# Altium PCB 2.0.PcbDoc
Units mil, origin at the board's own origin, x right, y up, seen from the top; angles counter-clockwise.
Board outline 3815 x 3365 mil, 2 copper layers (Top Layer, Bottom Layer); 23 components, 34 nets, 115 pads, 5 vias.
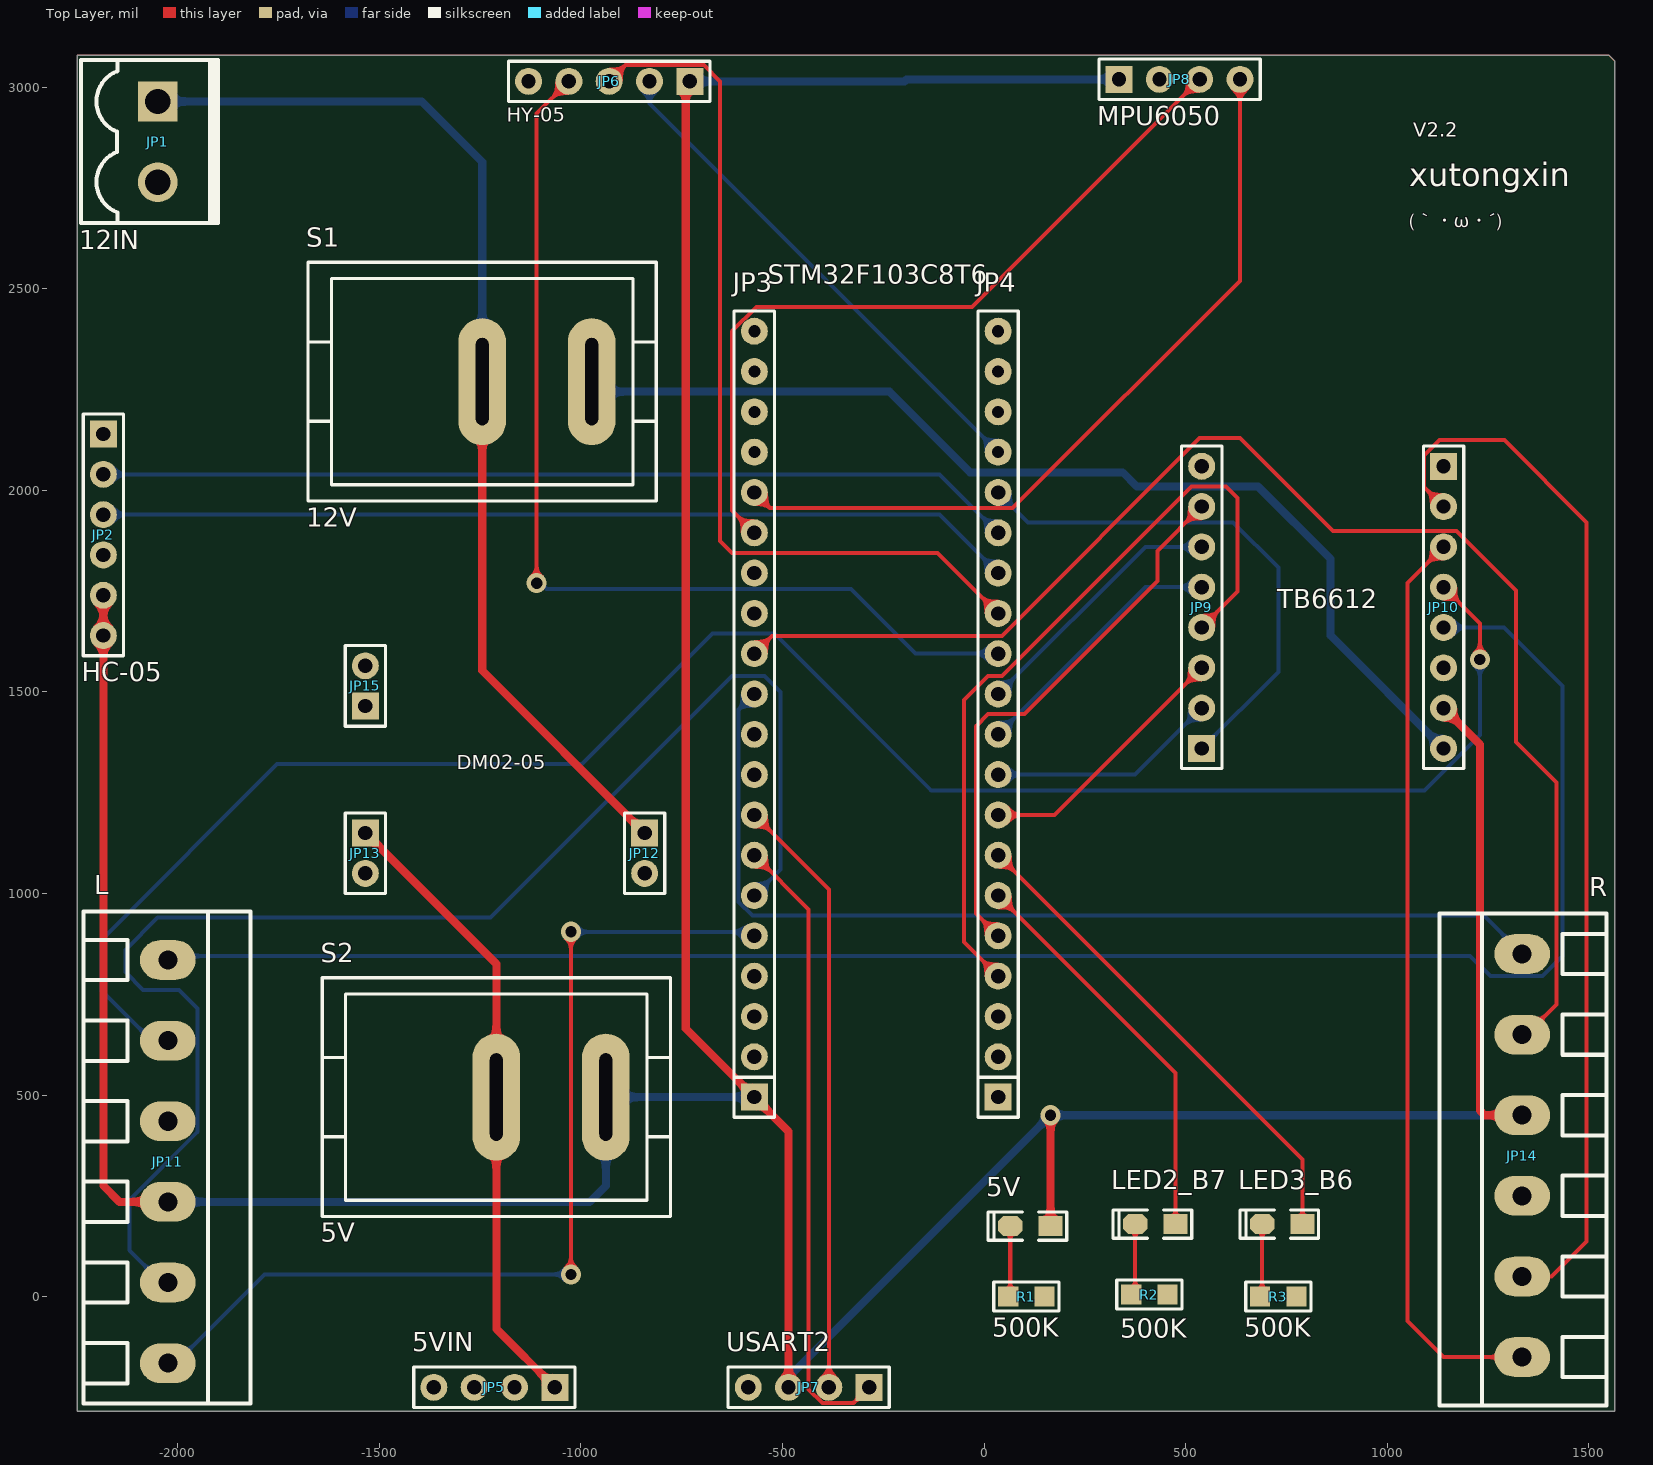
[diagram p0: Top Layer view]
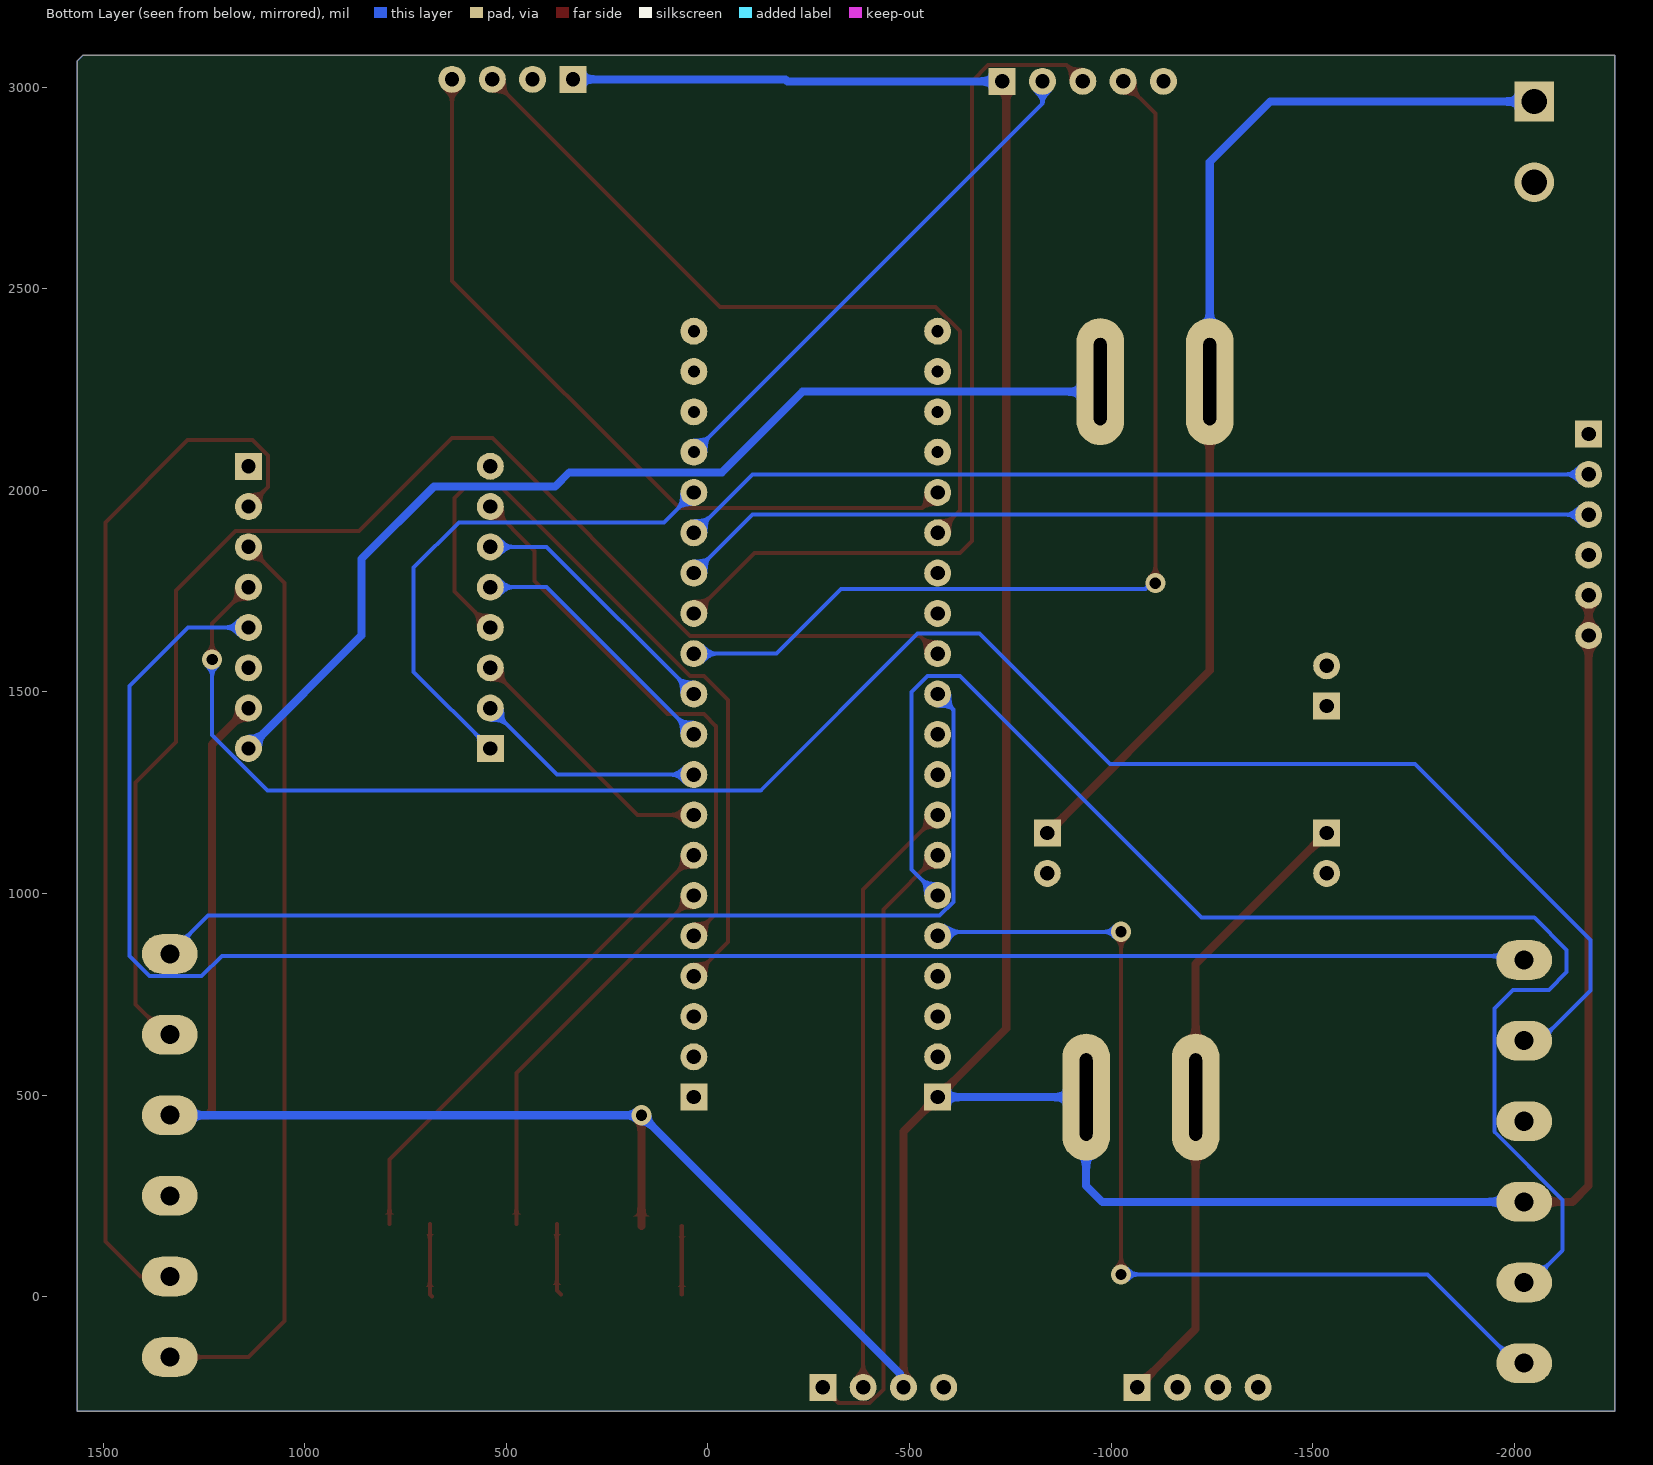
[diagram p1: Bottom Layer view, seen from below]

## Layer stack, top to bottom
Top Solder: solder mask 0.4, Solder Resist, Dk 3.5
Top Layer: signal copper 1.4
Dielectric 1: dielectric 12.6, FR-4, Dk 4.8
Bottom Layer: signal copper 1.4
Bottom Solder: solder mask 0.4, Solder Resist, Dk 3.5

## Board outline
-2250,-285 1565,-285 1565,3065.52 1550.52,3080 -2250,3080

## Design rules (kind name [scope] priority, off if disabled: settings)
Clearance [All] p1: gap=10 ignorepadtopadclearanceinfootprint=FALSE except(0: Arc-Hole Track-Hole SMDPad-Hole THPad-Hole Via-Hole Fill-Hole Poly-Hole Region-Hole Text-Hole)
PolygonConnect [All] p1: connectstyle=Relief reliefconductorwidth=10 reliefentries=4 polygonreliefangle="90 Angle" airgapwidth=10
RoutingVias [All] p1: holewidth=28 width=50 viastyle="Through Hole" minholewidth=28 minwidth=50 maxholewidth=28 maxwidth=50
SilkToSilkClearance [All] p1: silktosilkclearance=0
SilkToSolderMaskClearance [IsPad] p1: minsilkscreentomaskgap=0 clearancetoexposedcopper=TRUE
SolderMaskExpansion [All] p1: expansion=4 istentingtop=FALSE
Width [All] p1: maxlimit=20 minlimit=10 preferedwidth=10
28 further rules are at their usual default settings.

## Classes and differential pairs
component class 0.3: 5V JP1 JP2 JP3 JP4 JP5 JP8 JP10 JP12 JP15 LED2_B7 LED3_B6 R1 R2 R3 S1 S2

## Components (designator, comment, footprint, x,y, rotation, side; value= is the part's Value field where it differs from the comment)
5V "绿色" "LED 0805G" 115,175 r180 top (schematic designator LED1)
JP1 "12IN" KF2EDGK5.08-LI-2P -2050,2865 r270 top
JP2 "HC-05" HDR2.54-M-LI-6P -2185,1890 r270 top
JP3 "STM32F103C8T6" HDR2.54-M-LI-20P -570,1445 r90 top
JP4 "HDR-1X20" HDR2.54-M-LI-20P 35,1445 r90 top
JP5 "5VIN" HDR2.54-M-LI-4P -1215,-225 r180 top
JP6 "HY-05" HDR2.54-M-LI-5P -930,3015 r180 top
JP7 "USART2" HDR2.54-M-LI-4P -435,-225 r180 top
JP8 "MPU6050" HDR2.54-M-LI-4P 485,3020 r0 top
JP9 "HDR-1X8" HDR2.54-M-LI-8P 540,1710 r90 top
JP10 "TB6612" HDR2.54-M-LI-8P 1140,1710 r270 top
JP11 "L" KF128-5.08-6P -2025,335 r270 top
JP12 "HDR-1X2" HDR2.54-M-LI-2P -842.09,1100 r270 top
JP13 "HDR-1X2" HDR2.54-M-LI-2P -1535,1100 r270 top
JP14 "R" KF128-5.08-6P 1335,350 r90 top
JP15 "DM02-05" HDR2.54-M-LI-2P -1535,1515 r90 top
LED2_B7 "红色" "LED 0805G" 425,180 r180 top (schematic designator LED2)
LED3_B6 "红色" "LED 0805G" 740,180 r180 top (schematic designator LED3)
R1 "500K" "R 0805_M" 105,0 r0 top
R2 "500K" "R 0805_M" 410,5 r0 top
R3 "500K" "R 0805_M" 730,0 r0 top
S1 "12V" KCD1-101 -1245,2270 r0 top
S2 "5V" KCD1-101 -1210,495 r0 top

## Footprints (in the part's own frame and the unit in brackets; to place one, negate y for a bottom-side part, rotate by r counter-clockwise, add the part's x,y. Pads: shape width x height; smd on the part's side, far side on the other; paste and mask are expansions set on the pad)
HDR2.54-M-LI-2P [mm] "排母，2脚    淘宝ID:黄晶宝石   店铺网址:https://shop463601444.taobao.com"
  rect 1.7x1.7 hole 0.9: 1(-1.27,0)
  round 1.7 hole 0.9: 2(1.27,0)
  silkscreen extent -2.54,-1.27 2.54,1.27, body extent -2.54,-1.27 2.54,1.27, height 8.5
HDR2.54-M-LI-4P [mm] "排母，4脚  淘宝ID:黄晶宝石   店铺网址:https://shop463601444.taobao.com"
  rect 1.7x1.7 hole 0.9: 1(-3.81,0)
  round 1.7 hole 0.9: 2(-1.27,0) 3(1.27,0) 4(3.81,0)
  silkscreen extent -5.08,-1.27 5.08,1.27, body extent -5.08,-1.27 5.08,1.27, height 8.5
HDR2.54-M-LI-5P [mm] "排母，5脚   淘宝ID:黄晶宝石   店铺网址:https://shop463601444.taobao.com"
  rect 1.7x1.7 hole 0.9: 1(-5.08,0)
  round 1.7 hole 0.9: 2(-2.54,0) 3(0,0) 4(2.54,0) 5(5.08,0)
  silkscreen extent -6.35,-1.27 6.35,1.27, body extent -6.35,-1.27 6.35,1.27, height 8.5
HDR2.54-M-LI-6P [mm] "排母，6脚  淘宝ID:黄晶宝石   店铺网址:https://shop463601444.taobao.com"
  rect 1.7x1.7 hole 0.9: 1(-6.35,0)
  round 1.7 hole 0.9: 2(-3.81,0) 3(-1.27,0) 4(1.27,0) 5(3.81,0) 6(6.35,0)
  silkscreen extent -7.62,-1.27 7.62,1.27, body extent -7.62,-1.27 7.62,1.27, height 8.5
HDR2.54-M-LI-8P [mm] "排母，8脚"
  rect 1.7x1.7 hole 0.9: 1(-8.89,0)
  round 1.7 hole 0.9: 2(-6.35,0) 3(-3.81,0) 4(-1.27,0) 5(1.27,0) 6(3.81,0) 7(6.35,0) 8(8.89,0)
  silkscreen extent -10.16,-1.27 10.16,1.27, body extent -10.16,-1.27 10.16,1.27, height 8.5
HDR2.54-M-LI-20P [mm] "排母，20脚"
  rect 1.7x1.7 hole 0.9: 1(-24.13,0)
  round 1.7 hole 0.9: 2(-21.59,0) 3(-19.05,0) 4(-16.51,0) 5(-13.97,0) 6(-11.43,0) 7(-8.89,0) 8(-6.35,0) 9(-3.81,0) 10(-1.27,0) 11(1.27,0) 12(3.81,0) 13(6.35,0) 14(8.89,0) 15(11.43,0) 16(13.97,0)
  round 1.7 hole 0.762: 17(16.51,0) 18(19.05,0) 19(21.59,0) 20(24.13,0)
  silkscreen extent -25.4,-1.27 25.4,1.27, body extent -25.4,-1.27 25.4,1.27, height 8.5
KCD1-101 [mm] "船型开关立式      淘宝ID:黄晶宝石"
  oval 3x8 hole 0.8 slot 5.5 at 90 deg: 1(0,0) 2(6.9,0)
  silkscreen extent -10.97,-7.52 10.97,7.52, body extent -10.95,-7.5 10.95,7.5, height 20.3
KF2EDGK5.08-LI-2P [mm] "立插端子"
  rect 2.5x2.5 hole 1.6: 1(-2.54,0)
  round 2.5 hole 1.6: 2(2.54,0)
  silkscreen extent -5.16,-4.83 5.13,3.81, body extent -5.08,-4.75 5.08,3.75, height 11.25
KF128-5.08-6P [mm] "螺钉式接线端子，脚距5.08mm"
  oval 2.5x3.5 hole 1.2: 1(-12.7,0) 2(-7.62,0) 3(-2.54,0) 4(2.54,0) 5(7.62,0) 6(12.7,0)
  silkscreen extent -15.75,-5.31 15.24,5.21, body extent -15.74,-5.3 15.24,5.2, height 14.15
"LED 0805G" [mil] "绿色0805LED                              淘宝ID:黄晶宝石"
  rect 60x50 smd: 1(-50,0)
  oct 60x50 smd: 2(50,0)
  silkscreen extent -90,-35 105,35, body extent -39,-25 39,25, height 32
"R 0805_M" [mil] "1/8W贴片电阻"
  rect 50x50 smd: 1(-45,0) 2(45,0)
  silkscreen extent -81,-36 81,36, body extent -39,-25 39,25, height 20

## Part data
5V LED2_B7 LED3_B6: library part LED-SMD, "贴片LED", 学习资源=www.ooocke.com, 版权归属=源创客
  5V: BOM名称=电源指示
  LED2_B7 LED3_B6: BOM名称=贴片LED
JP1 JP12 JP13 JP15: library part "Header 2", "2P接插件"
  JP1: BOM名称=12V进入, 学习资源=www.ooocke.com, 版权归属=源创客
  JP12: BOM名称=DM02-2, 版权归属="封装库来自淘宝 ID：黄晶宝石", 联系售后=https://shop463601444.taobao.com
  JP13: BOM名称=DM02-1, 版权归属="封装库来自淘宝 ID：黄晶宝石", 联系售后=https://shop463601444.taobao.com
  JP15: BOM名称=DM02-3, 版权归属="封装库来自淘宝 ID：黄晶宝石", 联系售后=https://shop463601444.taobao.com
JP2 JP11 JP14: library part "Header 6", "6P接插件"
  JP2: BOM名称=HC-05, 学习资源=https://shop463601444.taobao.com, 版权归属="封装库来自淘宝 ID：黄晶宝石"
  JP11: BOM名称=左电机, 学习资源=www.ooocke.com, 版权归属=源创客
  JP14: BOM名称=右电机, 学习资源=www.ooocke.com, 版权归属=源创客
JP3 JP4: library part "Header 20", "20P接插件", 学习资源=https://shop463601444.taobao.com, 版权归属="封装库来自淘宝 ID：黄晶宝石"
  JP3: BOM名称=stm32-P3
  JP4: BOM名称=stm32-P4
JP5 JP7 JP8: library part "Header 4", "4P接插件", 学习资源=https://shop463601444.taobao.com, 版权归属="封装库来自淘宝 ID：黄晶宝石"
  JP5: BOM名称=USB-C
  JP7: BOM名称=USART2
  JP8: BOM名称=6050
JP6: library part "Header 5", "5P接插件", BOM名称=5P接插件, 学习资源=https://shop463601444.taobao.com, 版权归属="封装库来自淘宝 ID：黄晶宝石"
JP9 JP10: library part "Header 8", "8P接插件", 学习资源=https://shop463601444.taobao.com, 版权归属="封装库来自淘宝 ID：黄晶宝石"
  JP9: BOM名称=TB6612接插件1
  JP10: BOM名称=TB6612接插件2
R1 R2 R3: library part R, "贴片电阻", BOM名称=贴片电阻, 版权归属="来自淘宝 ID：黄晶宝石", 联系售后=https://shop463601444.taobao.com
  R2: ComponentLink1Description="New link"
S1 S2: library part KCD1-101, "1路单刀船型开关", BOM名称=1路单刀船型开关, 学习资源=www.ooocke.com, 版权归属="封装库来自淘宝 ID：黄晶宝石"

## Via types
v1: diameter 50, hole 28, Top Layer to Bottom Layer, 5 vias

## Nets (pads, with @x,y where several pads share a name; then routed paths per layer and width w, separated by ;. In a path a pad name is that pad's centre, name@x,y a point inside that pad or via, vN(x,y) a via of type N, cw(c..) or ccw(c..) an arc to the next point about the centre after c; other vN are vias at no path point)
5V: 5V.1 JP2.5 JP2.6 JP3.1 JP6.1 JP7.3 JP8.1 JP10.7 JP11.4 JP14.4 S2.2 | length 11284.6
  Top Layer w20: JP2.5 JP2.6 -2185,275 -2145,235 JP11.4 ; JP6.1 -740,3005 -740,665 JP3.1 -485,410 JP7.3 ; 5V.1 v1(165,450) ; JP10.7 1230,1370 1230,461.72 1241.72,450 JP14.4
  Bottom Layer w20: JP11.4 -978.35,235 -938.35,275 S2.2 JP3.1 ; JP6.1 -197,3015 -192,3020 JP8.1 ; JP7.3 -476.02,-216.02 -476.02,-191.02 v1(165,450) JP14.4
5V_IN: JP5.1 JP13.1 S2.1 | length 1569.7
  Top Layer w20: JP13.1 -1210,825 S2.1 -1210,-80 JP5.1
12V: JP10.8 S1.2 | length 2601.6
  Bottom Layer w20: S1.2 -948.35,2245 -235,2245 -35,2045 344,2045 379,2010 680,2010 860,1830 860,1640 JP10.8
12V_IN: JP1.1 JP12.1 S1.1 | length 2699
  Top Layer w20: S1.1 -1245,1552.91 JP12.1
  Bottom Layer w20: JP1.1 -1395,2965 -1245,2815 S1.1
A01: JP10.5 JP11.1 | length 4530.6
  Bottom Layer w10: JP11.1 -2015,845 1206,845 1256,795 1385,795 1435,845 1435,1515 1290,1660 JP10.5
A02: JP10.4 JP11.2 | length 4698.7
  Top Layer w10: JP10.4 1230,1670 v1(1230,1580.41)
  Bottom Layer w10: JP11.2 -2065,635 -2190,760 -2190,885 -1754,1321 -998,1321 -674,1645 -520,1645 -131,1256 1093,1256 1230,1393 v1(1230,1580.41)
AIN1: JP4.8 JP9.3 | length 656.2
  Top Layer w10: JP4.8 175,1195 JP9.3
AIN2: JP4.9 JP9.2 | length 573.3
  Bottom Layer w10: JP4.9 375,1295 JP9.2
B01: JP10.3 JP14.1 | length 2279.6
  Top Layer w10: JP10.3 1050,1770 1050,-60 1140,-150 JP14.1
B02: JP10.2 JP14.2 | length 2630.5
  Top Layer w10: JP10.2 1091.53,2008.47 1091.53,2086.53 1130,2125 1291,2125 1495,1921 1495,137 1408,50 JP14.2
BIN1: JP4.10 JP9.5 | length 656.2
  Bottom Layer w10: JP4.10 400,1760 JP9.5
BIN2: JP4.11 JP9.6 | length 656.2
  Bottom Layer w10: JP4.11 400,1860 JP9.6
BRX: JP2.2 JP4.15 | length 2280.1
  Bottom Layer w10: JP2.2 -110,2040 JP4.15
BTX: JP2.3 JP4.14 | length 2280.1
  Bottom Layer w10: JP2.3 -110,1940 JP4.14
GND: JP1.2 JP2.4 JP3.19 JP5.4 JP6.5 JP7.4 JP8.2 JP9.8 JP10.1 JP10.6 JP11.3 JP14.3 JP15.1 R1.2 R2.2 R3.2
HYIN: JP4.13 JP6.3 | length 2212.7
  Top Layer w10: JP6.3 -890,3055 -695,3055 -655,3015 -655,1875 -625,1845 -115,1845 JP4.13
HYOUT: JP4.12 JP6.4 | length 2495.6
  Top Layer w10: v1(-1110,1770) -1110,2935 JP6.4
  Bottom Layer w10: v1(-1110,1770) -1099.18,1770 -1084.18,1755 -330,1755 -170,1595 JP4.12
HYRUN: JP4.17 JP6.2 | length 1278.3
  Bottom Layer w10: JP6.2 -830,2960 JP4.17
L2_B7: JP4.6 LED2_B7.1 | length 997.3
  Top Layer w10: JP4.6 475,555 LED2_B7.1
L3_B6: JP4.7 LED3_B6.1 | length 1227.7
  Top Layer w10: JP4.7 790,340 LED3_B6.1
LA: JP3.5 JP11.6 | length 2400.3
  Top Layer w10: v1(-1025,55) v1(-1025,905)
  Bottom Layer w10: JP11.6 -2005.31,-165 -1785.31,55 v1(-1025,55) ; v1(-1025,905) -580,905 JP3.5
LB: JP3.6 JP11.5 | length 3524.6
  Bottom Layer w10: JP11.5 -2040,35 -2120,115 -2120,240 -1951,409 -1951,715 -1997,761 -2086,761 -2130,805 -2130,860 -2050,940 -1225,940 -625,1540 -545,1540 -505,1500 -505,1060 JP3.6
NetLED1_2: 5V.2 R1.1 | length 170
  Top Layer w10: R1.1@65,5 5V.2
NetLED2_2: LED2_B7.2 R2.1 | length 179.1
  Top Layer w10: R2.1 375,15 LED2_B7.2
NetLED3_2: LED3_B6.2 R3.1 | length 182.1
  Top Layer w10: R3.1 690,5 LED3_B6.2
PWMA-PA8: JP4.16 JP9.1 | length 1299.7
  Bottom Layer w10: JP4.16 109,1921 618,1921 730,1809 730,1550 JP9.1
PWMB-PA0: JP4.5 JP9.7 | length 1372.5
  Top Layer w10: JP4.5 -20,950 -20,1415 10,1445 100,1445 430,1775 430,1850 JP9.7
RA: JP3.11 JP14.6 | length 2529.6
  Bottom Layer w10: JP3.11 -609,1456 -609,979 -575,945 1240,945 JP14.6
RB: JP3.12 JP14.5 | length 3452.2
  Top Layer w10: JP3.12 -526,1639 44,1639 535,2130 635,2130 866,1899 1172.28,1899 1320,1751.28 1320,1376 1420,1276 1420,725 1345,650 JP14.5
SCL2: JP3.15 JP8.3 | length 1941.7
  Top Layer w10: JP3.15 -625,1950 -625,2395 -565,2455 -30,2455 JP8.3
SDA2: JP3.16 JP8.4 | length 1954.8
  Top Layer w10: JP3.16 -531,1956 71,1956 635,2520 JP8.4
STBY: JP4.4 JP9.4 | length 1988.6
  Top Layer w10: JP4.4 -50,880 -50,1480 10,1540 45,1540 515,2010 600,2010 629,1981 629,1749 JP9.4
USART2_RX: JP3.8 JP7.2 | length 1496.6
  Top Layer w10: JP3.8 -385,1010 JP7.2
USART2_TX: JP3.7 JP7.1 | length 1561.2
  Top Layer w10: JP3.7 -435,960 -435,-230 -401,-264 -324,-264 JP7.1
pads on no net: JP2.1 JP3.2 JP3.3 JP3.4 JP3.9 JP3.10 JP3.13 JP3.14 JP3.17 JP3.18 JP3.20 JP4.1 JP4.2 JP4.3 JP4.18 JP4.19 JP4.20 JP5.2 JP5.3 JP12.2 JP13.2 JP15.2

## Polygon pours and split planes (outlines as drawn)
GND on Top Layer "NONET_L01_P000" (solid, remove dead copper, shelved, pour order 0): -2250,3080 -2250,-285 1565,-285 1565,3065 1550,3080
GND on Bottom Layer "NONET_L02_P001" (solid, remove dead copper, shelved, pour order 1): -2250,3080 -2250,-285 1565,-285 1565,3065 1550,3080

## Silkscreen, mask and mechanical layers (free items; w line width, h text height)
Top Overlay:
  text "V2.2" at 1065,2865 h60
  text "xutongxin" at 1055,2735 h100
  text "(｀・ω・´)" at 1055,2640.05 h60
Mechanical 1:
  lines w10: -2250,-285 1565,-285 1565,2270 1565,3065.52 1550.52,3080 -2250,3080 -2250,-285